# EAGLE board LNA (EAGLE 8.6.1)
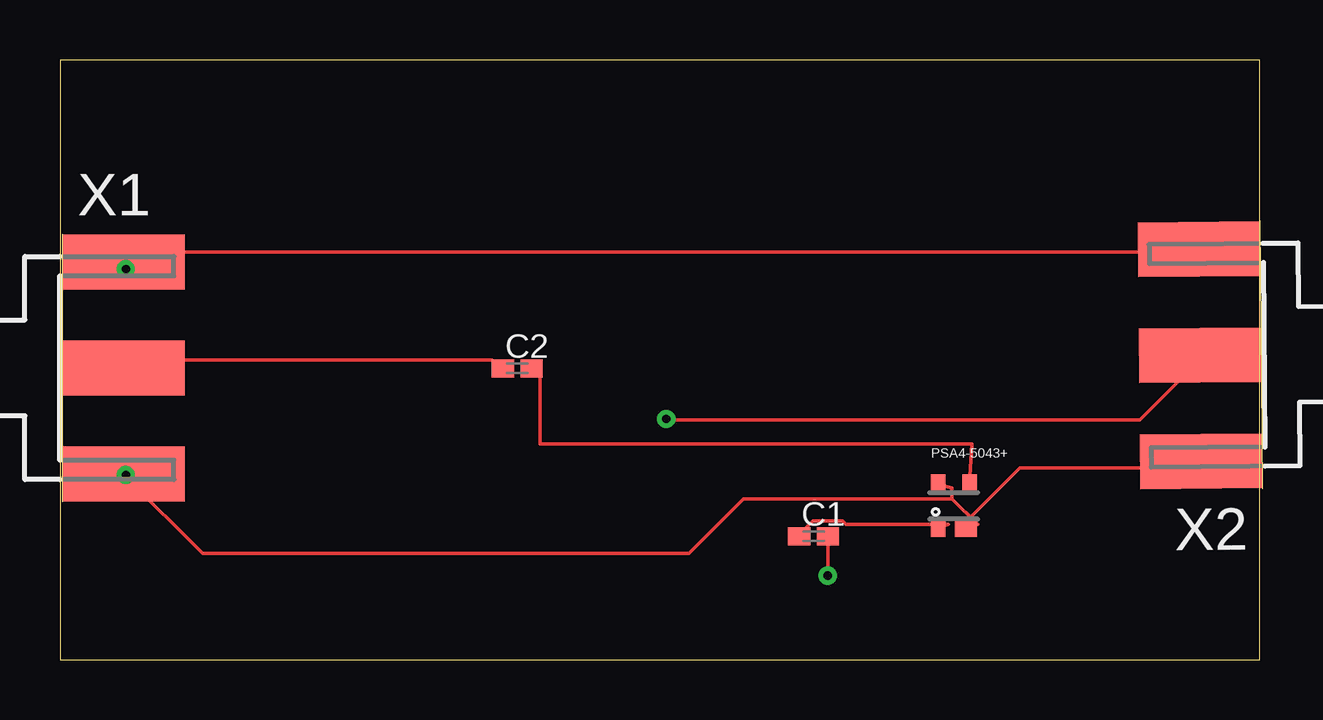
[diagram p0: board, top side]
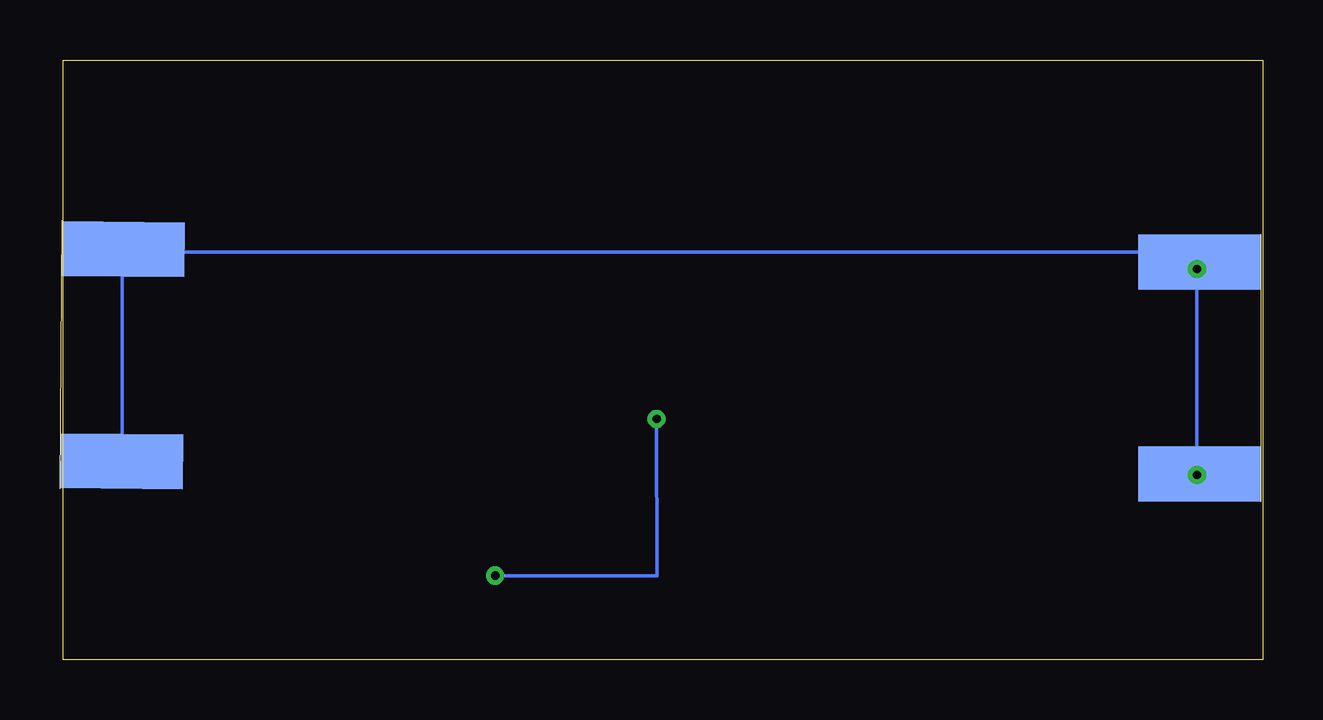
[diagram p1: board, bottom side, seen from below]

Size 50 x 25 mm. Coordinates in mm from the lower left corner, seen from the top.
Outline: 0,0 50,0 50,25 0,25 0,0
Copper layers (1*16): Top 0.035mm / dielectric 1.5mm / Bottom 0.035mm
Design rules "default *": minimum track width 6mil, minimum drill 13mm, track to track 6mil, track to pad 6mil, pad to pad 6mil, via to via 6mil, smd to smd 6mil, copper to edge 15mil, drill to drill 6mil, minimum pad ring 10mil, minimum via ring 8mil, stop-mask expansion 3mil, vias tented up to drill 0mil, thermal gap 10mil

## Footprints (pad centres in the part's own frame; a part is rotated, then mirrored left to right if it is on the bottom)
C0402K = smd 0.925 x 0.74: 1 -0.6,0; 2 0.6,0
PSA4-5043+ = smd 0.6 x 0.8: 1 -0.65,-0.9; 3 0.65,0.9; 4 -0.65,0.9 | smd 0.9 x 0.8: 2 0.5,-0.9
J502-ND-142-0701-801/806 = smd 5.08 x 2.286: 1 2.565,0; G@1 2.565,4.42; G@2 2.565,-4.42 | smd 5.08 x 2.286 bottom: G@3 2.565,4.42; G@4 2.565,-4.42

## Placement (x,y rotation side)
C1  100pF  [C0402K]  31.41,5.14 0 top
C2  100pF  [C0402K]  19.06,12.14 0 top
PSA4-5043+  PSA4-5043+  [PSA4-5043+]  37.26,6.41 0 top
X1  SMA-142-0701-801/806  [J502-ND-142-0701-801/806]  0.09,12.16 0 top
X2  SMA-142-0701-801/806  [J502-ND-142-0701-801/806]  50.09,12.71 180.5 top

## Library data of the parts
C1 C2 = rcl
PSA4-5043+ = PSA4-5043_; AVAILABILITY: Unavailable; DESCRIPTION: Ultra Low Noise MMIC Amplifier, 50ohm, 0.05 to 4 GHz; MF: Mini-Circuits; MP: PSA4-5043+; PACKAGE: None; PRICE: None
X1 X2 = con-coax; MF: JOHNSON COMPONENTS; MPN: 142-0701-801; OC_FARNELL: 1608592; OC_NEWARK: 90F2624

## Nets
GND: PSA4-5043+.2 PSA4-5043+.4 X1.G@1 X1.G@2 X1.G@3 X1.G@4 X2.G@2 X2.G@4
N$1: C2.2 PSA4-5043+.3
N$2: C1.1 PSA4-5043+.1
N$3: C2.1 X1.1
N$4: C1.2 X2.1

## Tracks (layer width: path | path; a pad name or v marks a point on that pad's centre or on a via)
GND  (via drill 0.35)
  Top 0.152: 37.19,6.71 37.19,7.16 PSA4-5043+.4 | 37.19,6.71 38.25,5.64 PSA4-5043+.2 38,6 40,8 47.5,8 | v2.74,7.7 2.74,7.77 X1.G@4 2.74,7.62 5.94,4.42 26.21,4.42 28.5,6.71 37.19,6.71 | v2.74,16.28 2.74,16.46 X1.G@3 3,17 47,17 X2.G@4
  Bottom 0.152: 47.55,8.38 47.55,17.07 X2.G@4 47,17 3,17 X1.G@3 2.74,16.46 v2.74,16.28 v2.74,7.7 | X1.G@4 2.74,7.77 v2.74,7.7 | v2.74,7.7 2.74,7.75
N$1
  Top 0.152: PSA4-5043+.3 38,9 20,9 20,12 C2.2
N$2
  Top 0.152: PSA4-5043+.1 37.03,5.64 32.77,5.64 32.61,5.79 31.39,5.79 30.79,5.18 C1.1
N$3
  Top 0.152: C2.1 18,12.5 3,12.5 X1.1
N$4  (via drill 0.35)
  Top 0.152: 32.16,5.03 C1.2 32,4 v32,3.5 | v25.27,10.03 25.5,10 45,10 47.5,12.5 X2.1
  Bottom 0.152: v32,3.5 25.25,3.5 v25.27,10.03